# Altium PCB PCB1.PcbDoc
Units mm, origin at the board's own origin, x right, y up, seen from the top; angles counter-clockwise.
Board outline 114.3 x 66.04 mm, 2 copper layers (Top Layer, Bottom Layer), stack 1.534 mm thick; 2 components, 12 nets, 24 pads, 0 vias.
Unrouted connection lines stored in the file: 2.
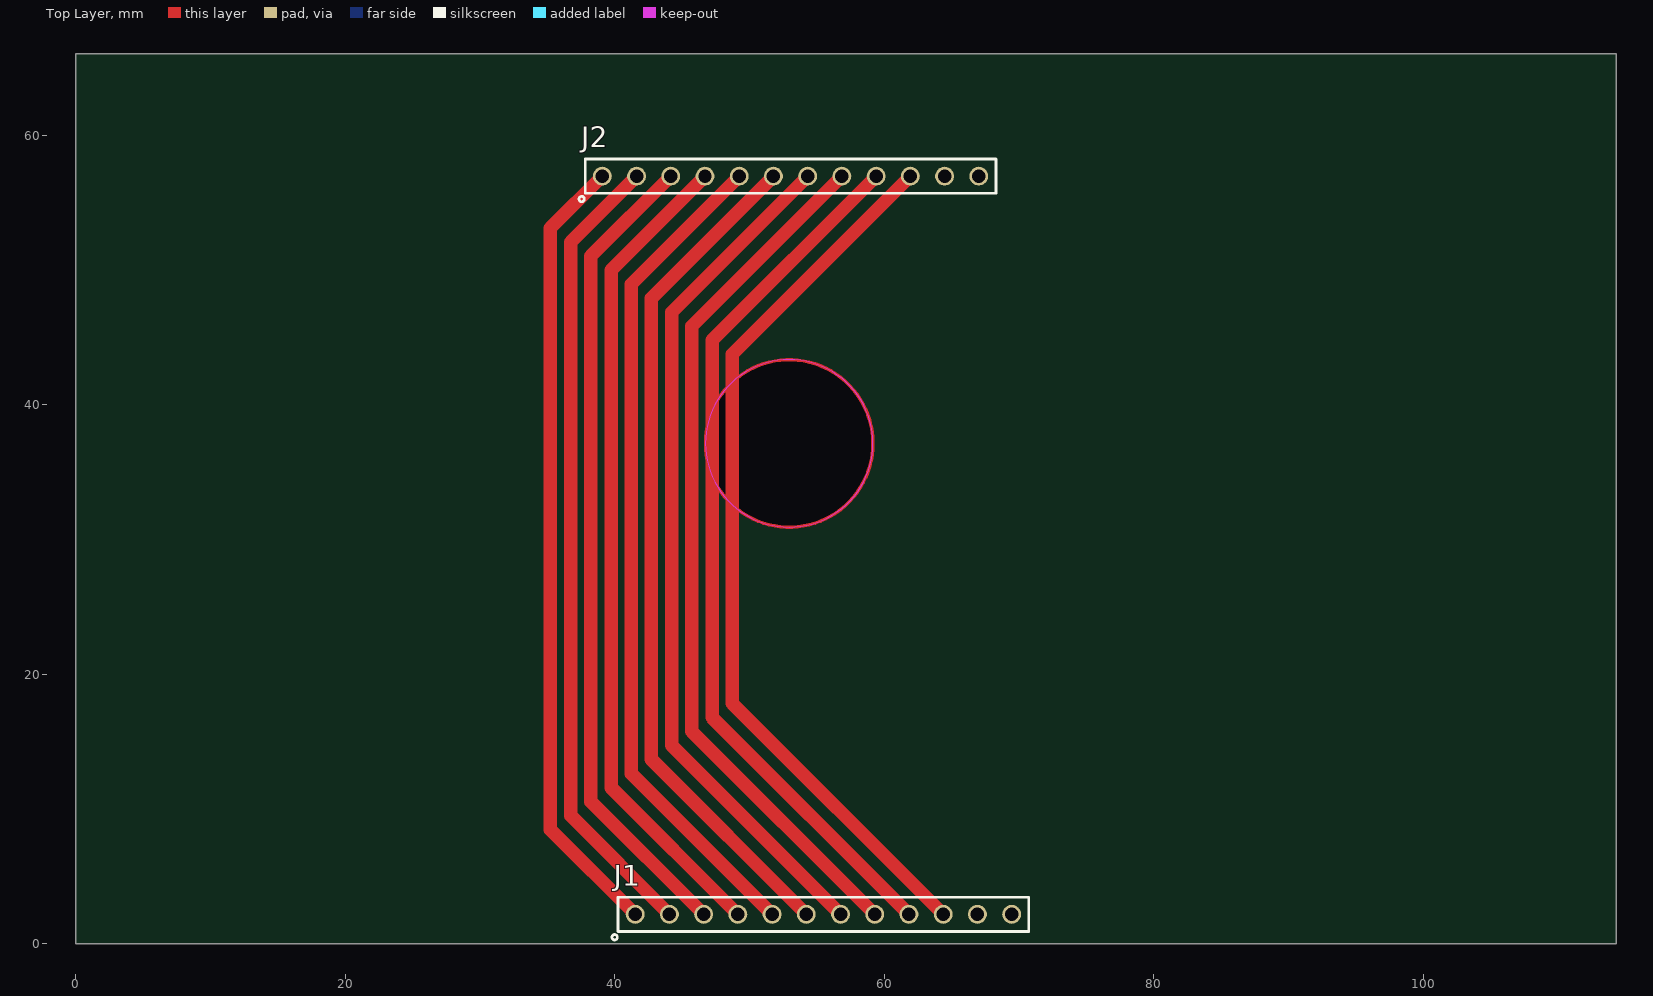
[diagram p0: Top Layer view]
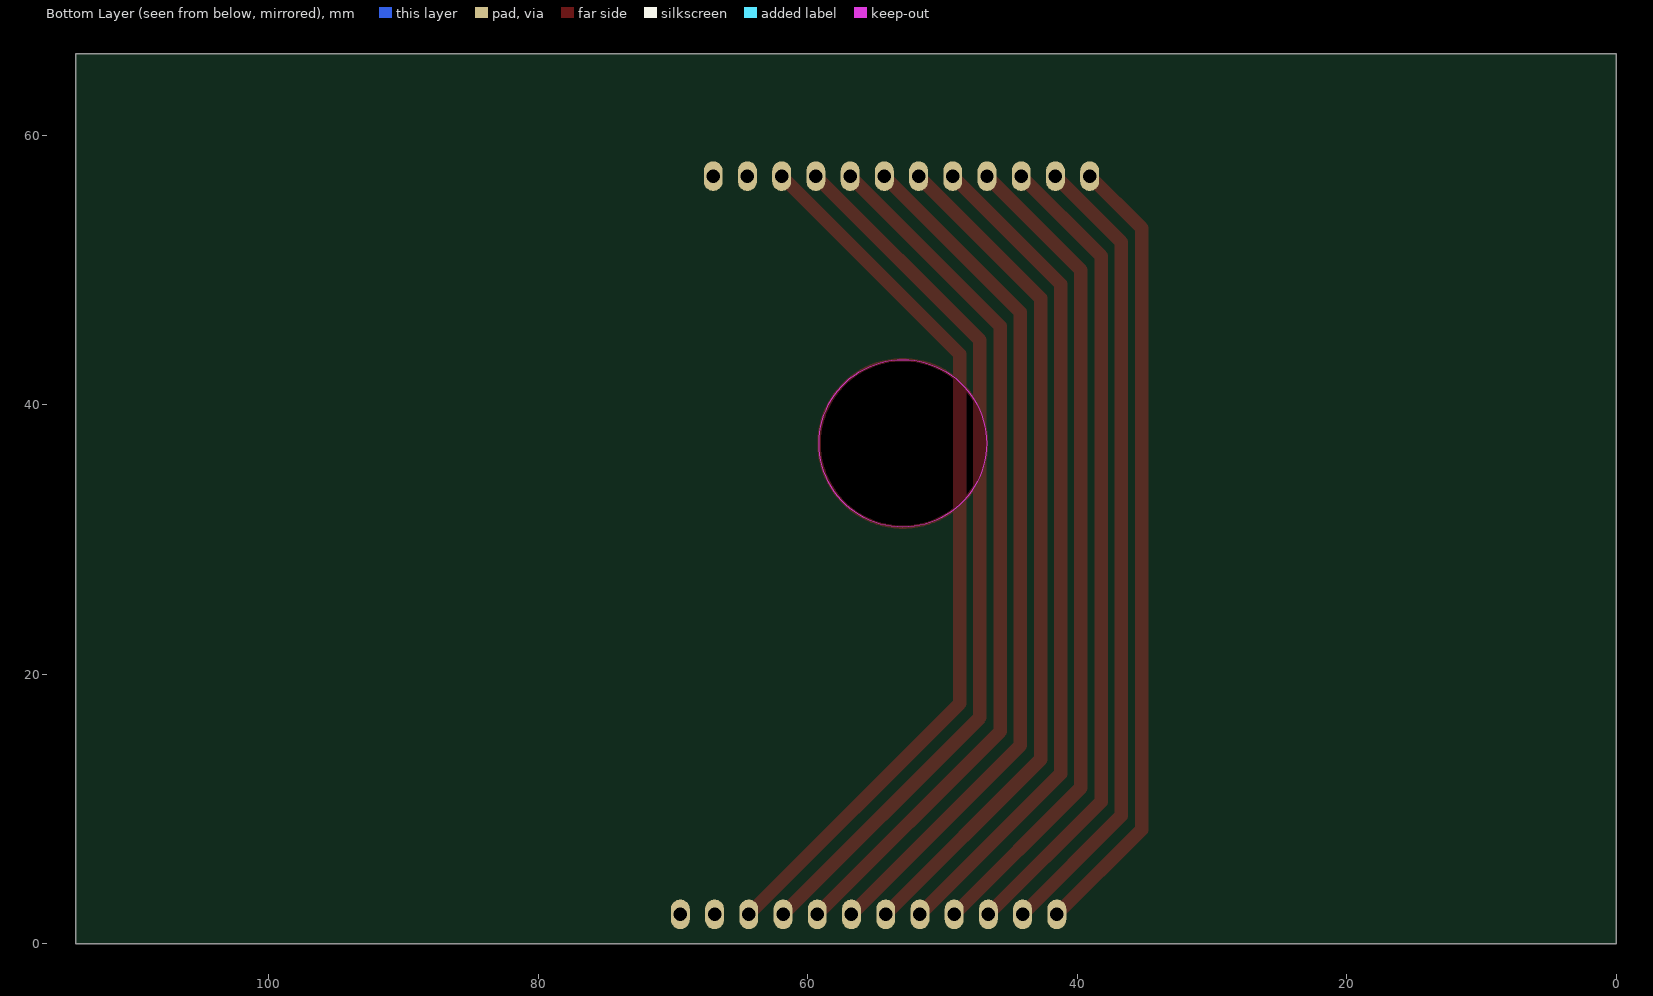
[diagram p1: Bottom Layer view, seen from below]

## Layer stack, top to bottom
Top Solder: solder mask 0.0127, Solder Resist, Dk 3.3
Top Layer: signal copper 0.0178
Dielectric1: core 1.4986, FR-4, Dk 4.3
Bottom Layer: signal copper 0.0178
Bottom Solder: solder mask 0.0127, Solder Resist, Dk 3.3

## Board outline
0,0 114.3,0 114.3,66.04 0,66.04
cut-out: 46.72,37.135 ccw(c52.934,37.135) 52.934,30.922 ccw(c52.934,37.135) 59.147,37.135 ccw(c52.934,37.135) 52.934,43.348 ccw(c52.934,37.135)

## Design rules (kind name [scope] priority, off if disabled: settings)
Clearance [All] p1: gap=0.5 ignorepadtopadclearanceinfootprint=FALSE except(0.254: Arc-Hole Track-Hole SMDPad-Hole THPad-Hole Via-Hole Fill-Hole Poly-Hole Region-Hole Text-Hole)
DiffPairsRouting [All] p1: maxlimit=0.254 minlimit=0.254 mostfreqgap=0.254 toplayer_minwidth=0.254 toplayer_maxwidth=0.254 toplayer_prefwidth=0.254 bottomlayer_minwidth=0.254 bottomlayer_maxwidth=0.254 bottomlayer_prefwidth=0.254 maxuncoupledlength=12.7
HoleSize [All] p1: absolutevalues=TRUE maxlimit=7.62 minlimit=0.254 maxpercent=80.000 minpercent=20.000
MinimumAnnularRing [All] p1: minimumring=0.254
PasteMaskExpansion [All] p1: expansion=0.254
PlaneClearance [All] p1: clearance=0.381
PlaneConnect [All] p1: pad.planeconnectstyle=Relief pad.reliefexpansion=0.508 pad.reliefentries=4 pad.reliefconductorwidth=0.254 pad.reliefairgap=0.254 via.planeconnectstyle=Direct via.reliefexpansion=0.508 via.reliefentries=4 via.reliefconductorwidth=0.254 via.reliefairgap=0.254
PolygonConnect [All] p1: thpad.connectstyle=Relief thpad.reliefconductorwidth=0.254 thpad.reliefentries=4 thpad.polygonreliefangle="90 Angle" thpad.airgapwidth=0.254 smdpad.connectstyle=Relief smdpad.reliefconductorwidth=0.254 smdpad.reliefentries=4 smdpad.polygonreliefangle="90 Angle" smdpad.airgapwidth=0.254 via.connectstyle=Direct via.reliefconductorwidth=0.254 via.reliefentries=4 via.polygonreliefangle="90 Angle" via.airgapwidth=0.254
RoomDefinition Sheet1 [InComponentClass('Sheet1')] p1: confinementstyle=ConfineIn formatcopy=TRUE lockcomponents=FALSE outline -189.586,-112.446 -138.786,-112.446 -138.786,-87.046 -189.586,-87.046
RoutingVias [All] p1: holewidth=0.254 width=0.508 viastyle="Through Hole" minholewidth=0.254 minwidth=0.508 maxholewidth=0.254 maxwidth=0.508
SMDNeckDown [All] p1: percent=100.000
SilkToSolderMaskClearance SilkscreenOverComponentPads [IsPad] p1: minsilkscreentomaskgap=0.254 clearancetoexposedcopper=TRUE
SolderMaskExpansion [All] p1: expansion=0.254 istentingtop=FALSE
Width Input [All] p1 off: maxlimit=0.75 minlimit=0.35 preferedwidth=0.5
Width Power [All] p2: maxlimit=1.5 minlimit=0.75 preferedwidth=1
24 further rules are at their usual default settings.

## Components (designator, comment, footprint, x,y, rotation, side; value= is the part's Value field where it differs from the comment)
J1 "HDRF12" HDR_F_1X12 55.474,2.184 r0 top
J2 "HDRF12" HDR_F_1X12 53.035,56.972 r0 top

## Footprints (in the part's own frame and the unit in brackets; to place one, negate y for a bottom-side part, rotate by r counter-clockwise, add the part's x,y. Pads: shape width x height; smd on the part's side, far side on the other; paste and mask are expansions set on the pad)
HDR_F_1X12 [mm] "Connector; Header; 12 Position"
  round 1.4 / inner round 1.4 / far side oval 1.4x2.2 hole 1: 1(-13.97,0) 2(-11.43,0) 3(-8.89,0) 4(-6.35,0) 5(-3.81,0) 6(-1.27,0) 7(1.27,0) 8(3.81,0) 9(6.35,0) 10(8.89,0) 11(11.43,0) 12(13.97,0)
  silkscreen extent -15.7,-1.9 15.24,1.27, body extent -15.24,-1.27 15.24,1.27, height 8.5

## Part data
J1 J2: library part "Header Female 1x12 THT", "CONN, HEADER, Female, pitch: 2.54mm, 12POS"

## Nets (pads, with @x,y where several pads share a name; then routed paths per layer and width w, separated by ;. In a path a pad name is that pad's centre, name@x,y a point inside that pad or via, vN(x,y) a via of type N, cw(c..) or ccw(c..) an arc to the next point about the centre after c; other vN are vias at no path point)
NetJ1_1: J1.1 J2.1 | length 59
  Top Layer w1: J2.1 35.211,53.118 35.211,8.477 J1.1
NetJ1_2: J1.2 J2.2 | length 59.9
  Top Layer w1: J2.2 36.711,52.078 36.711,9.517 J1.2
NetJ1_3: J1.3 J2.3 | length 60.7
  Top Layer w1: J2.3 38.211,51.038 38.211,10.557 J1.3
NetJ1_4: J1.4 J2.4 | length 61.6
  Top Layer w1: J2.4 39.711,49.998 39.711,11.597 J1.4
NetJ1_5: J1.5 J2.5 | length 62.4
  Top Layer w1: J2.5 41.211,48.958 41.211,12.637 J1.5
NetJ1_6: J1.6 J2.6 | length 63.3
  Top Layer w1: J2.6 42.711,47.918 42.711,13.677 J1.6
NetJ1_7: J1.7 J2.7 | length 64.2
  Top Layer w1: J2.7 44.211,46.878 44.211,14.717 J1.7
NetJ1_8: J1.8 J2.8 | length 65
  Top Layer w1: J2.8 45.711,45.838 45.711,15.757 J1.8
NetJ1_9: J1.9 J2.9 | length 65.9
  Top Layer w1: J2.9 47.211,44.798 47.211,16.797 J1.9
NetJ1_10: J1.10 J2.10 | length 66.7
  Top Layer w1: J2.10 48.711,43.758 48.711,17.837 J1.10
NetJ1_11: J1.11 J2.11
NetJ1_12: J1.12 J2.12
copper on no net: | length 39
  Top Layer w0.254: 59.147,37.135 ccw(c52.934,37.135) 59.147,37.135